# Altium PCB Wireless Temp PCB.PcbDoc
Units mm, origin at the board's own origin, x right, y up, seen from the top; angles counter-clockwise.
Board outline 166.37 x 113 mm, 2 copper layers (Top Layer, Bottom Layer); 74 components, 152 nets, 589 pads, 192 vias.
Unrouted connection lines stored in the file: 15.
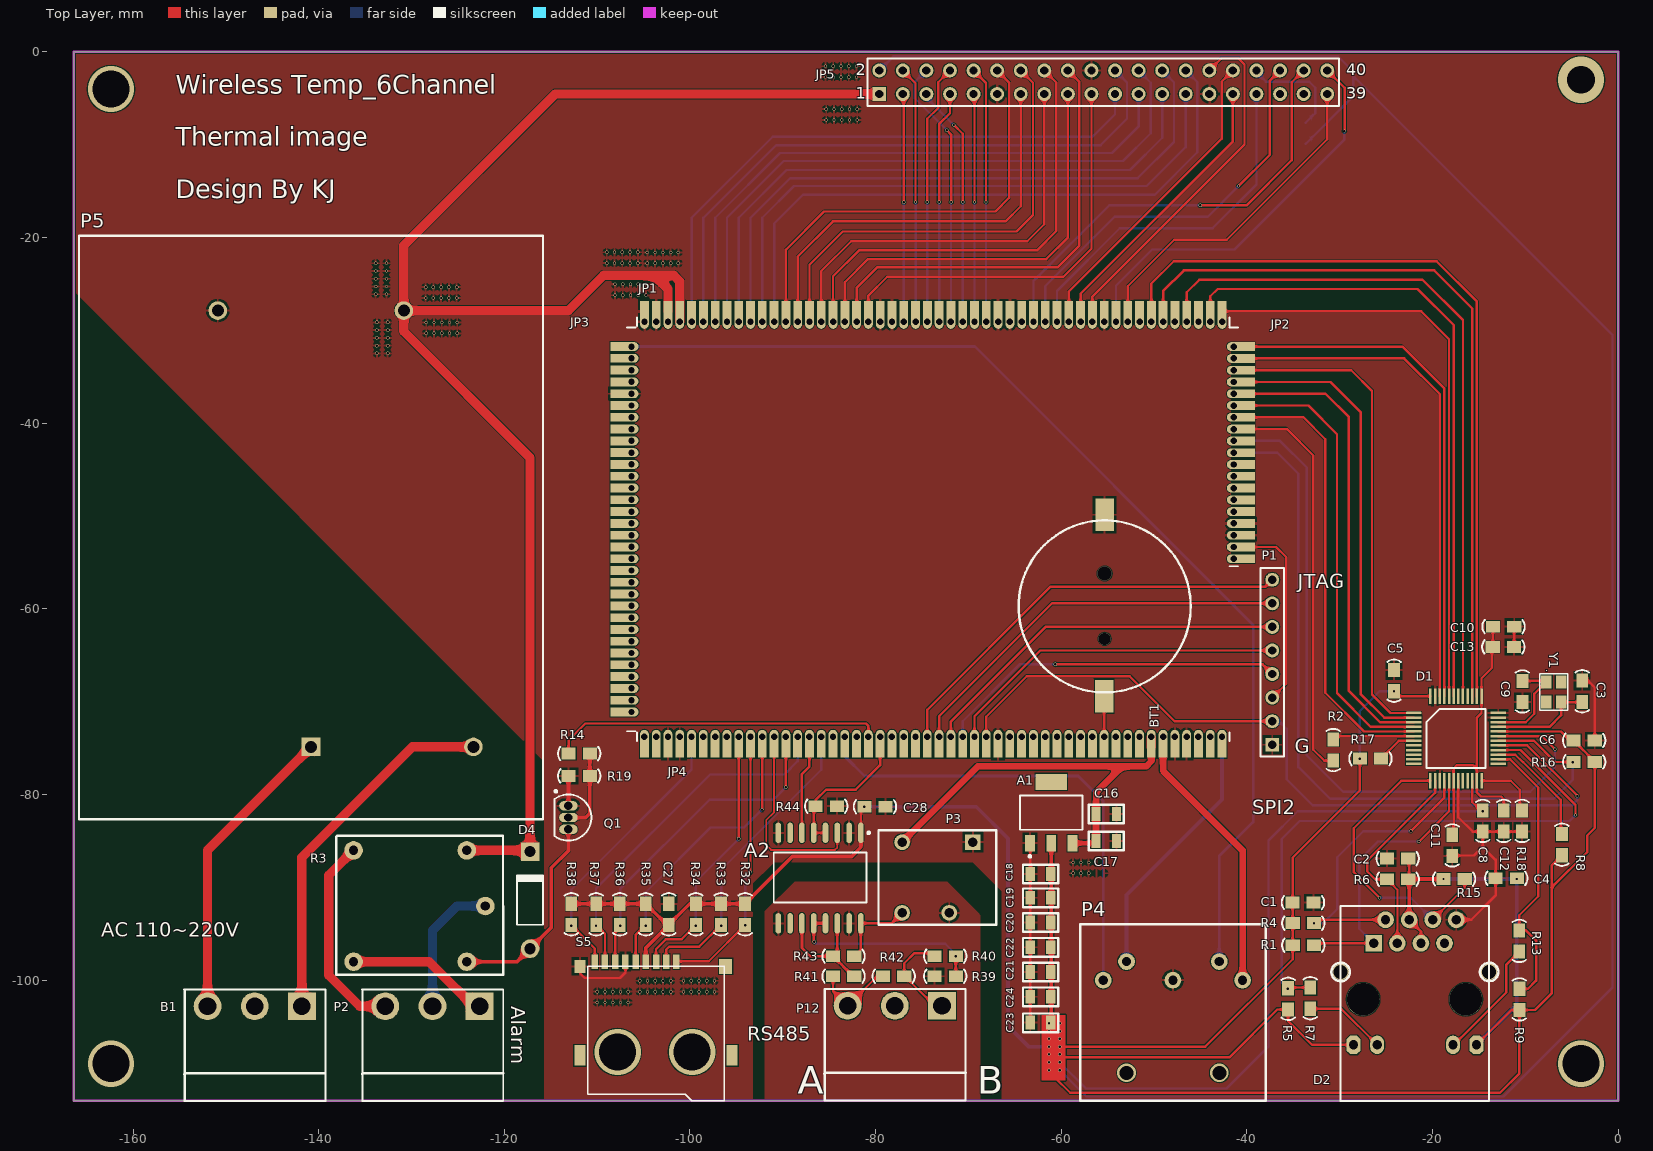
[diagram p0: Top Layer view]
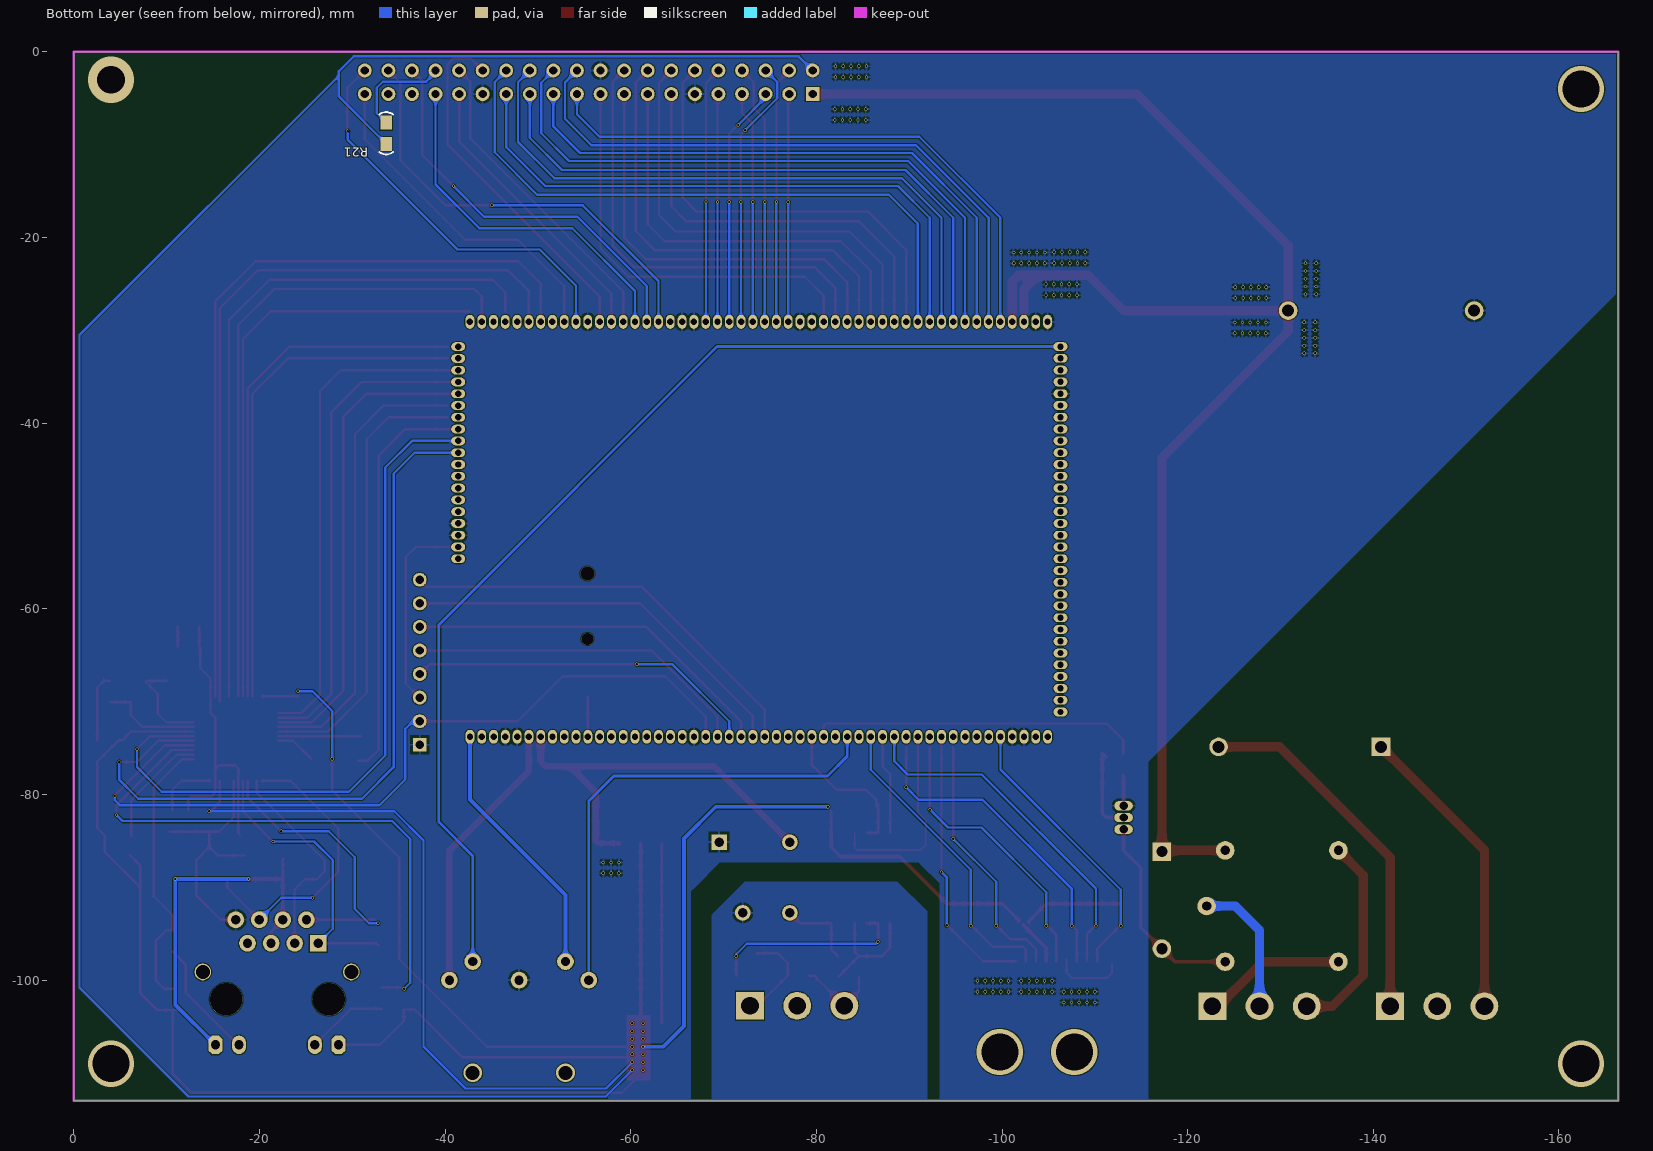
[diagram p1: Bottom Layer view, seen from below]

## Layer stack, top to bottom
Top Solder: solder mask 0.0102, Solder Resist, Dk 3.5
Top Layer: signal copper 0.0356
Dielectric 1: dielectric 0.32, FR-4, Dk 4.8
Bottom Layer: signal copper 0.0356
Bottom Solder: solder mask 0.0102, Solder Resist, Dk 3.5

## Board outline
-166.37,-113 -166.37,0 0,0 0,-113

## Design rules (kind name [scope] priority, off if disabled: settings)
Clearance [All] p1: gap=0.1
PolygonConnect [All] p1: connectstyle=Relief reliefconductorwidth=0.254 reliefentries=4 polygonreliefangle="90 Angle" airgapwidth=0.254
RoutingVias [All] p1: holewidth=0.711 width=1.27 viastyle="Through Hole" minholewidth=0.711 minwidth=1.27 maxholewidth=0.711 maxwidth=1.27
SolderMaskExpansion [All] p1: expansion=0.102
Width [All] p1: maxlimit=3 minlimit=0.1 preferedwidth=0.254 minimp=50.000000 maximp=50.000000 favimp=50.000000
30 further rules are at their usual default settings.

## Classes and differential pairs
component class RS232_485_SDcard: A2 C27 C28 P3 P4 P12 R32 R33 R34 R35 R36 R37 R38 R39 R40 R41 R42 R43 R44 S5
component class Power_USB: A1 B1 BT1 C16 C17 C18 C19 C20 C21 C22 C23 C24 P1 P5
component class main: JP1 JP2 JP3 JP4
component class LwIP: C1 C2 C3 C4 C5 C6 C8 C9 C10 C11 C12 C13 D1 D2 R1 R2 R4 R5 R6 R7 R8 R9 R13 R15 R16 R17 R18 Y1
component class LCD_Button_LED: D4 JP5 P2 Q1 R3 R14 R19 R21

## Components (designator, comment, footprint, x,y, rotation, side; value= is the part's Value field where it differs from the comment)
A1 "AMS1117-3.3V" AMS1117-3.3 -61.325,-81.823 r0 top
A2 "ADM2484E" RW-16 -81.585,-83.236 r270 top
B1 "Header 3" 歐式端子*3p -141.808,-102.819 r180 top
BT1 "Battery" "CR1220 battery holder" -55.321,-59.741 r90 top
C1 "Cap" 0805_C -35.09,-91.655 r0 top
C2 "Cap" 0805_C -22.612,-86.893 r180 top
C3 "Cap" 0805_C -3.878,-67.746 r270 top
C4 "Cap" 0805_C -10.912,-89.025 r180 top
C5 "Cap" 0805_C -24.13,-68.885 r90 top
C6 "Cap" 0805_C -4.797,-74.192 r0 top
C8 "Cap" 0805_C -14.597,-81.72 r270 top
C9 "Cap" 0805_C -10.305,-70.046 r90 top
C10 "Cap" 0805_C -13.48,-61.934 r0 top
C11 "Cap" 0805_C -17.882,-84.353 r270 top
C12 "Cap" 0805_C -12.337,-81.72 r270 top
C13 "Cap" 0805_C -13.505,-64.118 r0 top
C16 "Cap" 0805 -56.248,-82.11 r90 top
C17 "Cap" 0805 -56.248,-85.031 r90 top
C18 "Cap" 0805 -61.125,-88.554 r270 top
C19 "Cap" 0805 -61.125,-91.127 r270 top
C20 "Cap" 0805 -61.125,-93.794 r270 top
C21 "Cap" 0805 -61.125,-99.128 r270 top
C22 "Cap" 0805 -61.125,-96.461 r270 top
C23 "Cap" 0805 -61.125,-104.589 r270 top
C24 "Cap" 0805 -61.125,-101.795 r270 top
C27 "Cap" 0805_C -102.265,-94.057 r90 top
C28 "Cap" 0805_C -81.204,-81.331 r0 top
D1 "DP83848CVV" LQFP48 -17.467,-73.975 r0 top
D2 "HR911105A" RJ45-LED -26.314,-96.042 r180 top
D4 "Diode 1N4007" DO-41 -117.221,-91.389 r90 top
JP1 "HEADER 25X2" SIP-50-1.27-SMD -104.902,-29.083 r90 top
JP2 "HEADER 10X2" SIP-20-1.27-SMD -41.402,-30.48 r0 top
JP3 "HEADER 17X2" SIP-34-1.27-SMD -106.299,-72.39 r180 top
JP4 "HEADER 25X2" SIP-50-1.27-SMD -42.672,-73.787 r270 top
JP5 "HEADER 20X2    LCD 7 inch" HDR2X20 -79.602,-4.542 r0 top
P1 "JTAG轉版" HDR1X8 -37.262,-74.651 r90 top
P2 "Header 3" 歐式端子*3p -122.657,-102.819 r180 top
P3 "Header 4" B0505S-1W -69.52,-85.141 r180 top
P4 "Header 5" "DIN 固定座 方型 5P TO PCB 2003" -57.963,-113.005 r0 top
P5 "PM-05-5" "MW PM-05-5" -115.824,-82.677 r90 top
P12 "Header 3" 歐式端子*3p -72.847,-102.768 r180 top
Q1 "2N3904" TO-92A -113.093,-82.491 r180 top
R1 "Res1" 0805_C -35.057,-96.255 r0 top
R2 "Res1" 0805_C -30.683,-76.352 r90 top
R3 "LEG-SERIES 24V relay" "LEG-SERIES 5V" -122.037,-92.024 r180 top
R4 "Res1" 0805_C -35.057,-93.876 r0 top
R5 "Res1" 0805_C -35.563,-100.885 r270 top
R6 "Res1" 0805_C -22.612,-89.125 r180 top
R7 "Res1" 0805_C -33.163,-103.085 r90 top
R8 "Res1" 0805_C -6.071,-84.277 r270 top
R9 "Res1" 0805_C -10.647,-100.943 r270 top
R13 "Res1" 0805_C -10.636,-96.925 r90 top
R14 "Res1" 0805_C -113.064,-75.603 r0 top
R15 "Res1" 0805_C -18.812,-89.125 r0 top
R16 "Res1" 0805_C -4.797,-76.513 r0 top
R17 "Res1" 0805_C -25.545,-76.132 r180 top
R18 "Res1" 0805_C -10.355,-81.72 r270 top
R19 "Res1" 0805_C -113.064,-78.016 r0 top
R21 "Res1" 0805_C -33.655,-9.906 r90 bottom
R32 "Res1" 0805_C -94.065,-91.779 r270 top
R33 "Res1" 0805_C -96.665,-91.779 r270 top
R34 "Res1" 0805_C -99.365,-91.779 r270 top
R35 "Res1" 0805_C -104.771,-91.779 r270 top
R36 "Res1" 0805_C -107.565,-91.779 r270 top
R37 "Res1" 0805_C -110.114,-91.779 r270 top
R38 "Res1" 0805_C -112.785,-91.779 r270 top
R39 "Res1" 0805_C -73.635,-99.593 r0 top
R40 "Res1" 0805_C -73.635,-97.434 r0 top
R41 "Res1" 0805_C -84.582,-99.593 r0 top
R42 "Res1" 0805_C -76.911,-99.573 r180 top
R43 "Res1" 0805_C -84.582,-97.434 r0 top
R44 "Res1" 0805_C -84.176,-81.255 r180 top
S5 "TF_CARD" TF-CARD -103.644,-98.507 r0 top
Y1 "25MHz-SMD" XTAL-3225 -6.926,-68.979 r270 top

## Footprints (in the part's own frame and the unit in brackets; to place one, negate y for a bottom-side part, rotate by r counter-clockwise, add the part's x,y. Pads: shape width x height; smd on the part's side, far side on the other; paste and mask are expansions set on the pad)
0805 [mil] "SMD"
  rect 59x39 smd: 1(0,0) 2(0,-87)
  silkscreen extent -39,-118 40,31
0805_C [mil]
  rect 60x50 smd: 1(-0.16,0.4) 2(89.84,0.4)
  silkscreen extent -45,-28 135,29
AMS1117-3.3 [mm] "AMS1117-3.3V"
  rect 1.05x1.75 smd: 1(-2.046,-3.427) 2(0.254,-3.427) 3(2.554,-3.427)
  rect 3.4x1.75 smd: 4(0.254,3.173)
  silkscreen extent -3.1,-4.98 3.6,1.72
B0505S-1W [mm] "NCSHAK B0505S-1W DC-DC?源模? 5V?5V 隔离???源模? SIP"
  rect 1.7x1.7 hole 1: 1(0,0)
  round 1.7 hole 1: 2(7.62,0) 3(7.62,7.62) 4(2.54,7.62)
  silkscreen extent -2.54,-1.27 10.16,8.89
"CR1220 battery holder" [mm] "CR1220 電池角座"
  rect 3.5x2 smd: 1(-9.703,0.051) 2(9.881,0)
  silkscreen extent -9.27,-9.27 9.27,9.27
"DIN 固定座 方型 5P TO PCB 2003" [mm]
  round 1.8 hole 1: 1(17.5,13) 2(10,13) 3(2.5,13) 4(15,15) 5(5,15)
  silkscreen extent 0,0 20,19
DO-41 [mm] "Diode, Axial; Body 5.2 x 2.7 mm (LxDia. max), Lead Dia. 0.86 mm (max)"
  round 2 hole 1.2: 1(-5.23,0)
  rect 2x2 hole 1.2: 2(5.23,0)
  silkscreen extent -2.65,-1.4 2.75,1.4
HDR1X8 [mm] "Connector; Header; 8 Position"
  rect 1.5x1.5 hole 0.9: 1(0,0)
  round 1.5 hole 0.9: 2(2.54,0) 3(5.08,0) 4(7.62,0) 5(10.16,0) 6(12.7,0) 7(15.24,0) 8(17.78,0)
  silkscreen extent -1.27,-1.27 19.05,1.27
HDR2X20 [mm] "Connector; Header; 20x2 Position"
  rect 1.5x1.5 hole 0.9: 1(0,0)
  round 1.5 hole 0.9: 2(0,2.54) 3(2.54,0) 4(2.54,2.54) 5(5.08,0) 6(5.08,2.54) 7(7.62,0) 8(7.62,2.54) 9(10.16,0) 10(10.16,2.54) 11(12.7,0) 12(12.7,2.54) 13(15.24,0) 14(15.24,2.54) 15(17.78,0) 16(17.78,2.54) 17(20.32,0) 18(20.32,2.54) 19(22.86,0) 20(22.86,2.54) 21(25.4,0) 22(25.4,2.54) 23(27.94,0) 24(27.94,2.54) 25(30.48,0) 26(30.48,2.54) 27(33.02,0) 28(33.02,2.54) 29(35.56,0) 30(35.56,2.54) 31(38.1,0) 32(38.1,2.54) 33(40.64,0) 34(40.64,2.54) 35(43.18,0) 36(43.18,2.54) 37(45.72,0) 38(45.72,2.54) 39(48.26,0) 40(48.26,2.54)
  silkscreen extent -1.27,-1.27 49.53,3.81
"LEG-SERIES 5V" [mm] "Realy 5V"
  round 2 hole 1: 1(2,-6) 2(2,6) 3(14.2,6) 4(14.2,-6) 5(0,0)
  silkscreen extent -1.93,-7.58 16.08,7.42
LQFP48 [mm]
  oval 1.7x0.27 smd: 1(-4.551,2.756)
  rect 1.7x0.27 smd: 2(-4.551,2.256) 3(-4.551,1.756) 4(-4.551,1.256) 5(-4.551,0.756) 6(-4.551,0.256) 7(-4.551,-0.244) 8(-4.551,-0.744) 9(-4.551,-1.244) 10(-4.551,-1.744) 11(-4.551,-2.244) 12(-4.551,-2.744) 25(4.549,-2.744) 26(4.549,-2.244) 27(4.549,-1.744) 28(4.549,-1.244) 29(4.549,-0.744) 30(4.549,-0.244) 31(4.549,0.256) 32(4.549,0.756) 33(4.549,1.256) 34(4.549,1.756) 35(4.549,2.256) 36(4.549,2.756)
  rect 0.27x1.7 smd: 13(-2.751,-4.544) 14(-2.251,-4.544) 15(-1.751,-4.544) 16(-1.251,-4.544) 17(-0.751,-4.544) 18(-0.251,-4.544) 19(0.249,-4.544) 20(0.749,-4.544) 21(1.249,-4.544) 22(1.749,-4.544) 23(2.249,-4.544) 24(2.749,-4.544) 37(2.749,4.556) 38(2.249,4.556) 39(1.749,4.556) 40(1.249,4.556) 41(0.749,4.556) 42(0.249,4.556) 43(-0.251,4.556) 44(-0.751,4.556) 45(-1.251,4.556) 46(-1.751,4.556) 47(-2.251,4.556) 48(-2.751,4.556)
  silkscreen extent -3.17,-3.16 3.16,3.17
"MW PM-05-5" [mm] "MEAN WELL  Input 100-240VAC , Ootput 5V"
  rect 2x2 hole 1.3: 1(7.8,25)
  round 2 hole 1.3: 2(7.8,7.5) 3(54.8,15) 4(54.8,35.04)
  silkscreen extent 0,0 62.85,50
RJ45-LED [mm]
  round 3.5 hole 3.5 unplated: 0(-9.9,6.035) 0(1.16,6.035)
  rect 1.8x1.8 hole 1: 1(0.01,-0.005)
  round 1.8 hole 1: 2(-1.26,-2.545) 3(-2.53,-0.005) 4(-3.8,-2.545) 5(-5.07,-0.005) 6(-6.34,-2.545) 7(-7.61,-0.005) 8(-8.88,-2.545)
  oct 1.5x2 hole 0.991: 9(2.185,10.935) 12(-11.065,10.935)
  oval 1.5x2 hole 0.991: 10(-0.355,10.935) 11(-8.525,10.935)
  round 1.8 hole 1.5: S1(-12.42,3.085) S2(3.58,3.085)
  silkscreen extent -13.42,-4.02 4.58,16.98
RW-16 [mm]
  oval 2.2x0.6 smd: 1(0.9,0) 2(0.9,-1.27) 3(0.9,-2.54) 4(0.9,-3.81) 5(0.9,-5.08) 6(0.9,-6.35) 7(0.9,-7.62) 8(0.9,-8.89) 9(10.65,-8.89) 10(10.65,-7.62) 11(10.65,-6.35) 12(10.65,-5.08) 13(10.65,-3.81) 14(10.65,-2.54) 15(10.65,-1.27) 16(10.65,0)
  silkscreen extent 0.78,-9.39 8.42,0.98
SIP-20-1.27-SMD [mm]
  oval 1.5x0.95 hole 0.69: 2(0,-1.273) 3(0,-2.543) 4(0,-3.813) 5(0,-5.083) 6(0,-6.353) 7(0,-7.623) 8(0,-8.893) 9(0,-10.163) 10(0,-11.433) 11(0,-12.703) 12(0,-13.973) 13(0,-15.243) 14(0,-16.513) 15(0,-17.783) 16(0,-19.053) 17(0,-20.323) 18(0,-21.593) 19(0,-22.863) 20(0,-24.133)
  rect 2.25x0.95 smd: 2(1.13,-1.273) 3(1.13,-2.543) 4(1.13,-3.813) 5(1.13,-5.083) 6(1.13,-6.353) 7(1.13,-7.623) 8(1.13,-8.893) 9(1.13,-10.163) 10(1.13,-11.433) 11(1.13,-12.703) 12(1.13,-13.973) 13(1.13,-15.243) 14(1.13,-16.513) 15(1.13,-17.783) 16(1.13,-19.053) 17(1.13,-20.323) 18(1.13,-21.593) 19(1.13,-22.863) 20(1.13,-24.133)
  silkscreen extent -0.47,-24.93 0.47,0.8
SIP-34-1.27-SMD [mm]
  oval 1.5x0.95 hole 0.69: 2(0,-1.273) 3(0,-2.543) 4(0,-3.813) 5(0,-5.083) 6(0,-6.353) 7(0,-7.623) 8(0,-8.893) 9(0,-10.163) 10(0,-11.433) 11(0,-12.703) 12(0,-13.973) 13(0,-15.243) 14(0,-16.513) 15(0,-17.783) 16(0,-19.053) 17(0,-20.323) 18(0,-21.593) 19(0,-22.863) 20(0,-24.133) 21(0,-25.403) 22(0,-26.673) 23(0,-27.943) 24(0,-29.213) 25(0,-30.483) 26(0,-31.753) 27(0,-33.023) 28(0,-34.293) 29(0,-35.563) 30(0,-36.833) 31(0,-38.103) 32(0,-39.373) 33(0,-40.643)
  rect 2.25x0.95 smd: 2(1.13,-1.273) 3(1.13,-2.543) 4(1.13,-3.813) 5(1.13,-5.083) 6(1.13,-6.353) 7(1.13,-7.623) 8(1.13,-8.893) 9(1.13,-10.163) 10(1.13,-11.433) 11(1.13,-12.703) 12(1.13,-13.973) 13(1.13,-15.243) 14(1.13,-16.513) 15(1.13,-17.783) 16(1.13,-19.053) 17(1.13,-20.323) 18(1.13,-21.593) 19(1.13,-22.863) 20(1.13,-24.133) 21(1.13,-25.403) 22(1.13,-26.673) 23(1.13,-27.943) 24(1.13,-29.213) 25(1.13,-30.483) 26(1.13,-31.753) 27(1.13,-33.023) 28(1.13,-34.293) 29(1.13,-35.563) 30(1.13,-36.833) 31(1.13,-38.103) 32(1.13,-39.373) 33(1.13,-40.643)
  silkscreen extent -0.47,-42.71 0.47,0.8
SIP-50-1.27-SMD [mm]
  oval 1.5x0.95 hole 0.69: 1(0,-0.003) 2(0,-1.273) 3(0,-2.543) 4(0,-3.813) 5(0,-5.083) 6(0,-6.353) 7(0,-7.623) 8(0,-8.893) 9(0,-10.163) 10(0,-11.433) 11(0,-12.703) 12(0,-13.973) 13(0,-15.243) 14(0,-16.513) 15(0,-17.783) 16(0,-19.053) 17(0,-20.323) 18(0,-21.593) 19(0,-22.863) 20(0,-24.133) 21(0,-25.403) 22(0,-26.673) 23(0,-27.943) 24(0,-29.213) 25(0,-30.483) 26(0,-31.753) 27(0,-33.023) 28(0,-34.293) 29(0,-35.563) 30(0,-36.833) 31(0,-38.103) 32(0,-39.373) 33(0,-40.643) 34(0,-41.913) 35(0,-43.183) 36(0,-44.453) 37(0,-45.723) 38(0,-46.993) 39(0,-48.263) 40(0,-49.533) 41(0,-50.803) 42(0,-52.073) 43(0,-53.343) 44(0,-54.613) 45(0,-55.883) 46(0,-57.153) 47(0,-58.423) 48(0,-59.693) 49(0,-60.963) 50(0,-62.233)
  rect 2.25x0.95 smd: 1(1.13,-0.003) 2(1.13,-1.273) 3(1.13,-2.543) 4(1.13,-3.813) 5(1.13,-5.083) 6(1.13,-6.353) 7(1.13,-7.623) 8(1.13,-8.893) 9(1.13,-10.163) 10(1.13,-11.433) 11(1.13,-12.703) 12(1.13,-13.973) 13(1.13,-15.243) 14(1.13,-16.513) 15(1.13,-17.783) 16(1.13,-19.053) 17(1.13,-20.323) 18(1.13,-21.593) 19(1.13,-22.863) 20(1.13,-24.133) 21(1.13,-25.403) 22(1.13,-26.673) 23(1.13,-27.943) 24(1.13,-29.213) 25(1.13,-30.483) 26(1.13,-31.753) 27(1.13,-33.023) 28(1.13,-34.293) 29(1.13,-35.563) 30(1.13,-36.833) 31(1.13,-38.103) 32(1.13,-39.373) 33(1.13,-40.643) 34(1.13,-41.913) 35(1.13,-43.183) 36(1.13,-44.453) 37(1.13,-45.723) 38(1.13,-46.993) 39(1.13,-48.263) 40(1.13,-49.533) 41(1.13,-50.803) 42(1.13,-52.073) 43(1.13,-53.343) 44(1.13,-54.613) 45(1.13,-55.883) 46(1.13,-57.153) 47(1.13,-58.423) 48(1.13,-59.693) 49(1.13,-60.963) 50(1.13,-62.233)
  silkscreen extent -0.47,-63.03 0.47,0.8
TF-CARD [mm]
  rect 0.7x1.6 smd: 1(2.19,0.488) 2(1.09,0.488) 3(-0.01,0.488) 4(-1.11,0.488) 5(-2.21,0.488) 6(-3.31,0.488) 7(-4.41,0.488) 8(-5.51,0.488) 9(-6.61,0.488)
  rect 1.2x1.4 smd: 10(-8.21,-0.012)
  rect 1.2x2.2 smd: 11(-8.21,-9.612) 13(8.19,-9.612)
  rect 1.4x1.6 smd: 12(7.49,-0.012)
  silkscreen extent -7.36,-14.51 7.34,-0.01
TO-92A [mm] "TO, Flat Index; 3 In-Line, Axial Leads; Body Dia. 4.5mm; Leads 0.51 x 0.48 mm (max)"
  oval 2x1 hole 0.9: 1(0,-1.27) 2(0,0) 3(0,1.27)
  silkscreen extent -2.48,-2.95 1.5,2.48, body extent -2.5,-2.5 1.5,2.5, height 6.86
XTAL-3225 [mm]
  rect 1.4x1.15 smd: 1(-1.113,-0.812) 2(1.087,-0.812) 3(1.087,0.788) 4(-1.113,0.788)
  silkscreen extent -1.96,-1.51 1.94,1.49
歐式端子*3p [mm]
  rect 3x3 hole 1.9: 1(0,0)
  round 3 hole 1.9: 2(5.08,0) 3(10.16,0)
  silkscreen extent -2.55,-1.8 12.68,10.2

## Part data
B1 P2 P12: "Header, 3-Pin"
BT1: "Multicell Battery"
C1 C2 C3 C4 C5 C6 C8 C9 C10 C11 C12 C13 C16 C17 C18 C19 C20 C21 C22 C23 C24 C27 C28: "Capacitor"
D4: library part "Diode 1N914", "High Conductance Fast Diode"
JP5: library part "HEADER 20X2"
P1: library part "Header 8", "Header, 8-Pin"
P3: "Header, 4-Pin"
P4: "Header, 5-Pin"
P5: library part "Header 4", "Header, 4-Pin"
Q1: "NPN General Purpose Amplifier"
R1 R2 R4 R5 R6 R7 R8 R9 R13 R14 R15 R16 R17 R18 R19 R21 R32 R33 R34 R35 R36 R37 R38 R39 R40 R41 R42 R43 R44: "Resistor"
R3: library part "LEG-SERIES 5V relay"
Y1: library part CRYSTAL-SMD, "Crystal"

## Via types
v1: diameter 0.356, hole 0.254, Top Layer to Bottom Layer, tented both sides, 182 vias
v2: diameter 5, hole 4, Top Layer to Bottom Layer, 5 vias
v3: diameter 2, hole 1.5, Top Layer to Bottom Layer, 2 vias
v4: diameter 1.5, hole 1.5, Top Layer to Bottom Layer, 1 vias
v5: diameter 1.3, hole 1.3, Top Layer to Bottom Layer, 1 vias
v6: diameter 5, hole 3, Top Layer to Bottom Layer, 1 vias

## Nets (pads, with @x,y where several pads share a name; then routed paths per layer and width w, separated by ;. In a path a pad name is that pad's centre, name@x,y a point inside that pad or via, vN(x,y) a via of type N, cw(c..) or ccw(c..) an arc to the next point about the centre after c; other vN are vias at no path point)
+3.3V: JP2.19 JP2.20 JP3.2 JP3.3 P1.3 | length 21.8
  Top Layer w0.254: JP2.19@-41.402,-53.343 -40.272,-53.343 -36.852,-53.343 -35.763,-54.432 -35.763,-68.072 P1.3
+3.3V_1: A1.2 A2.1 C1.1 C2.1 C4.1 C5.1 C6.1 C8.1 C18.1 C19.1 C20.1 C21.1 C22.1 C23.1 C24.1 C27.1 C28.1 D1.22 D1.32 D1.48 D2.4 D2.5 D2.9 D2.12 JP5.2 R1.1 R4.1 R5.2 R6.1 R8.2 R9.2 R15.1 R16.2 R17.2 R21.1 R32.1 R33.1 R34.1 R35.1 R36.1 R37.1 R38.1 S5.4 | length 673.4
  Top Layer w0.254: A2.1 C28.1@-81.585,-81.788 ; C28.1 v1(-81.205,-81.324) ; -60.655,-110.515 -59.03,-112.141 -12.725,-112.141 -10.636,-110.052 R9.2 ; v1(-60.147,-107.169) -44.481,-107.169 -35.061,-97.748 R1.1 R4.1 -35.061,-86.801 -27.827,-79.566 v1(-27.827,-76.142) ; -59.715,-108.331 -41.885,-108.331 -36.721,-103.167 R5.2 -35.553,-104.401 -32.982,-106.972 D2.9@-28.5,-106.972 ; C5.1@-24.167,-69.419 D1.48 ; C2.1 -22.515,-86.997 R6.1@-22.515,-89.115 ; D2.4@-22.515,-93.492 -21.245,-94.762 D2.5@-21.245,-96.032 ; D1.22 -15.718,-80.839 C8.1@-14.841,-81.716 ; D2.12@-15.25,-106.972 -11.503,-103.225 R9.2 ; D1.32 -6.162,-73.219 -5.199,-74.181 C6.1 R16.2@-2.515,-76.467 ; R8.2 -7.163,-87.662 -7.163,-90.043 ; R16.2 -2.515,-83.603 -3.331,-84.419 -3.331,-86.212 -7.163,-90.043 ; R9.2 -8.941,-103.225 -7.163,-101.448 -7.163,-90.043
  Top Layer w0.4: R38.1 R37.1 R36.1 R35.1 C27.1@-102.832,-93.704 ; S5.4@-104.754,-97.979 -104.754,-96.54 C27.1 ; C27.1@-101.85,-93.606 -100.019,-91.775 R34.1 R33.1 R32.1 -88.97,-86.69 -82.575,-86.69 -81.585,-85.7 A2.1 ; C23.1@-61.071,-104.535 A1.2 ; D2.4@-22.515,-93.492 -22.515,-89.115 v1(-18.816,-89.115)
  Bottom Layer w0.254: JP5.2 -78.083,-0.483 -30.15,-0.483 -28.55,-2.083 -28.55,-2.565 ; v1(-60.147,-109.7) -57.3,-112.547 -12.344,-112.547 -0.61,-100.813 -0.61,-30.505 -28.55,-2.565 ; v1(-60.147,-108.864) -57.328,-111.684 -42.189,-111.684 -37.668,-107.163 -37.668,-84.963 -34.519,-81.813 v1(-14.58,-81.813) ; R21.1 -28.55,-4.815 -28.55,-2.565 ; v1(-27.827,-76.142) -27.827,-71.007 -25.709,-68.889 v1(-24.14,-68.889)
  Bottom Layer w0.4: v1(-81.205,-81.324) -69.146,-81.324 -65.735,-84.734 -65.735,-104.953 -63.519,-107.169 v1(-61.316,-107.169) ; v1(-18.816,-89.115) v1(-10.908,-89.115) -10.908,-102.631 D2.12@-15.25,-106.972
  other v1: -61.316,-109.7 -61.316,-108.864 -61.316,-108.004 -60.147,-108.004 -61.316,-106.333 -60.147,-106.333 -61.316,-105.498 -60.147,-105.498 -61.316,-104.663 -60.147,-104.663
+5V_2: A2.16 P3.3 R43.2 | length 8.7
  Top Layer w0.3: R43.2 -81.585,-96.709 A2.16 -78.265,-93.886 P3.3
"AC L": B1.1 P5.2 | length 39.4
  Top Layer w1: B1.1 -141.808,-86.792 -129.893,-74.877 P5.2
"AC N": B1.3 P5.1 | length 32.6
  Top Layer w1: B1.3 -151.968,-86.021 P5.1
D1+: JP4.2
D1-: JP4.3
GND: A1.1 A2.2 A2.8 BT1.2 C1.2 C2.2 C3.1 C4.2 C5.2 C6.2 C8.2 C9.1 C10.2 C11.2 C12.2 C13.2 C16.2 C17.2 C18.2 C19.2 C20.2 C21.2 C22.2 C23.2 C24.2 C27.2 C28.2 D1.15 D1.19 D1.35 D1.36 D1.47 D2.8 JP1.1 JP1.2 JP1.21 JP1.22 JP1.31 JP1.32 JP1.40 JP2.17 JP2.18 JP3.29 JP4.4 JP4.5 JP4.20 JP4.47 JP4.48 JP5.11 JP5.20 JP5.29 P1.1 P3.1 P4.2 P5.4 Q1.1 R18.2 R19.1 R44.1 S5.6 S5.10 | length 68.3
  Top Layer w0.254: S5.10@-111.845,-98.276 -111.845,-99.269 -111.335,-99.779 -107.535,-99.779 -106.945,-99.189 S5.6@-106.945,-97.776 ; A1.1 -63.334,-85.286 C18.2 C19.2 C20.2 C22.2 C21.2 C24.2 C23.2@-63.334,-104.335 ; C11.2@-18.405,-86.585 -15.515,-86.585 -14.587,-85.656 ; D2.8@-17.435,-93.492 -15.815,-93.492 -13.194,-90.872 C4.2 -13.194,-87.049 -14.587,-85.656 ; D1.19 -17.218,-82.451 -15.667,-84.002 C8.2 ; C13.2 -11.198,-64.082 C10.2 ; R18.2 C12.2 C8.2 ; C3.1 -3.251,-67.742 -2.515,-68.478 C6.2 ; -14.587,-85.656 C8.2
  Top Layer w0.4: Q1.1 -113.093,-78.03 R19.1 ; C23.2 C23.2@-63.334,-104.335
  other v1: -109.982,-102.413 -109.147,-102.413 -108.311,-102.413 -107.476,-102.413 -106.64,-102.413 -109.982,-101.244 -109.147,-101.244 -108.311,-101.244 -107.476,-101.244 -106.64,-101.244 -105.399,-101.244 -104.563,-101.244 -103.728,-101.244 -102.893,-101.244 -102.057,-101.244 -100.7,-101.244 -99.864,-101.244 -99.029,-101.244 -98.194,-101.244 -97.358,-101.244 -105.399,-100.076 -104.563,-100.076 -103.728,-100.076 -102.893,-100.076 -102.057,-100.076 -100.7,-100.076 -99.864,-100.076 -99.029,-100.076 -98.194,-100.076 -97.358,-100.076 -58.714,-88.494 -57.878,-88.494 -57.043,-88.494 -58.714,-87.325 -57.878,-87.325 -57.043,-87.325 -133.731,-32.484 -132.563,-32.484 -133.731,-31.648 -132.563,-31.648 -133.731,-30.813 -132.563,-30.813 -128.411,-30.328 -127.576,-30.328 -126.74,-30.328 -125.905,-30.328 -125.07,-30.328 -133.731,-29.978 -132.563,-29.978 -128.411,-29.159 -127.576,-29.159 -126.74,-29.159 -125.905,-29.159 -125.07,-29.159 -133.731,-29.142 -132.563,-29.142 -128.473,-26.518 -127.638,-26.518 -126.802,-26.518 -125.967,-26.518 -125.132,-26.518 -108.066,-26.213 -107.23,-26.213 -106.395,-26.213 -105.56,-26.213 -104.724,-26.213 -133.858,-26.108 -132.69,-26.108 -128.473,-25.349 -127.638,-25.349 -126.802,-25.349 -125.967,-25.349 -125.132,-25.349 -133.858,-25.273 -132.69,-25.273 -108.066,-25.044 -107.23,-25.044 -106.395,-25.044 -105.56,-25.044 -104.724,-25.044 -133.858,-24.438 -132.69,-24.438 -133.858,-23.602 -132.69,-23.602 -104.586,-22.784 -103.751,-22.784 -102.915,-22.784 -102.08,-22.784 -101.244,-22.784 -133.858,-22.767 -132.69,-22.767 -108.955,-22.758 -108.119,-22.758 -107.284,-22.758 -106.449,-22.758 -105.613,-22.758 -104.586,-21.615 -103.751,-21.615 -102.915,-21.615 -102.08,-21.615 -101.244,-21.615 -108.955,-21.59 -108.119,-21.59 -107.284,-21.59 -106.449,-21.59 -105.613,-21.59 -85.319,-7.341 -84.483,-7.341 -83.648,-7.341 -82.812,-7.341 -81.977,-7.341 -85.319,-6.172 -84.483,-6.172 -83.648,-6.172 -82.812,-6.172 -81.977,-6.172 -85.395,-2.718 -84.559,-2.718 -83.724,-2.718 -82.889,-2.718 -82.053,-2.718 -85.395,-1.549 -84.559,-1.549 -83.724,-1.549 -82.889,-1.549 -82.053,-1.549
GND2: A2.9 A2.15 P3.4 R39.1
LCD_BL: JP5.34 R21.2 | length 11.4
  Bottom Layer w0.254: JP5.34 -38.962,-2.207 -37.948,-3.221 -33.279,-3.221 -32.639,-3.861 -32.639,-6.618 R21.2
LED_ACT: D1.26 R9.1 R13.2 | length 30.6
  Top Layer w0.254: D1.26 -11.64,-76.219 -8.603,-79.256 -8.603,-90.975 -10.647,-93.019 R13.2 -9.918,-94.643 -8.836,-95.725 -8.836,-100.055 -9.72,-100.939 R9.1
LED_LINK: D1.28 R5.1 R7.2 | length 63.3
  Top Layer w0.254: R5.1@-35.475,-100.803 R7.2 ; D1.28 -10.507,-75.219 -4.597,-81.128 v1(-4.597,-82.22)
  Bottom Layer w0.254: v1(-35.585,-100.94) -36.246,-100.279 -36.246,-84.811 -34.29,-82.855 -5.232,-82.855 v1(-4.597,-82.22)
NetA2_11: A2.11 A2.14 R41.2 R43.1 | length 13.2
  Top Layer w0.3: A2.11 -87.935,-96.545 -87.056,-97.424 R43.1 ; A2.14 -84.125,-96.963 R43.1 ; R41.2@-82.427,-99.583 R43.1
NetA2_12: A2.12 A2.13 R39.2 R40.2 | length 21.9
  Top Layer w0.3: v1(-86.614,-95.885) -86.665,-95.834 A2.12 A2.13 ; R39.2@-71.353,-99.507 v1(-71.353,-97.424) R40.2@-71.353,-97.094
  Bottom Layer w0.254: v1@-86.639,-95.936 v1@-86.639,-95.91 ; v1@-86.639,-95.86 v1@-86.639,-95.91 ; v1@-86.614,-95.936 v1@-86.639,-95.91 ; v1(-86.614,-95.885) -86.411,-96.088 -72.492,-96.088 -71.353,-97.227 v1(-71.353,-97.424) ; v1@-71.378,-97.475 v1@-71.378,-97.45 ; v1@-71.378,-97.399 v1@-71.378,-97.45 ; v1@-71.353,-97.475 v1@-71.378,-97.45
NetC3_2: C3.2 D1.33 Y1.3 | length 11
  Top Layer w0.254: D1.33 -7.381,-72.719 -6.138,-71.476 Y1.3 -3.906,-70.066 C3.2
NetC9_2: C9.2 D1.34 Y1.1 | length 10.6
  Top Layer w0.254: D1.34 -9.947,-72.219 -9.035,-71.306 -9.035,-69.163 Y1.1 -7.84,-67.765 C9.2@-10.035,-67.765
NetC10_1: C10.1 C11.1 C12.1 C13.1 D1.18 D1.23 D1.37 | length 33
  Top Layer w0.254: C11.1 -17.718,-84.196 D1.18 -17.718,-77.17 -17.391,-76.843 -15.664,-76.843 -15.218,-77.289 ; C10.1 -13.509,-61.949 C13.1 -13.607,-64.205 -13.607,-66.379 -14.718,-67.49 D1.37 -14.718,-71.224 -15.218,-71.724 -15.218,-77.289 ; C12.1 -12.326,-80.511 -12.616,-80.222 -14.775,-80.222 -15.218,-79.778 D1.23 -15.218,-77.289
NetD1_6: D1.6 R2.2 | length 8.9
  Top Layer w0.254: R2.2@-30.937,-73.719 D1.6
NetD1_7: D1.7 R17.1 | length 4.3
  Top Layer w0.254: R17.1 -23.617,-74.219 D1.7
NetD1_24: D1.24 R18.1 | length 6.7
  Top Layer w0.254: D1.24 -11.575,-78.519 -10.599,-79.495 R18.1@-10.599,-81.716
NetD1_27: D1.27 R8.1 | length 12.7
  Top Layer w0.254: D1.27 -11.073,-75.719 -10.254,-76.539 -10.228,-76.539 -6.177,-80.59 R8.1@-6.177,-84.52
NetD2_10: D2.10 R7.1 | length 8.8
  Top Layer w0.254: R7.1 -29.843,-103.089 D2.10@-25.96,-106.972
NetD2_11: D2.11 R13.1 | length 13
  Top Layer w0.254: D2.11@-17.712,-106.99 -12.036,-101.315 -12.036,-98.319 R13.1
NetQ1_2: Q1.2 R14.2 R19.2 | length 9.5
  Top Layer w0.4: Q1.2 -111.218,-82.491 -110.782,-82.055 R19.2 R14.2 R14.2@-111.159,-75.969
PA0_MII_CRS_WAKEUP: JP1.46
PA1_MII_RX_CLK: D1.38 JP1.44 | length 84.5
  Top Layer w0.254: JP1.44@-50.289,-29.083 -50.289,-27.953 -50.289,-24.965 -47.879,-22.555 -19.558,-22.555 -15.218,-26.895 D1.38 D1.38@-15.218,-69.458
PA2_MII_MDIO: D1.30 JP2.11 R16.1 | length 82.3
  Top Layer w0.254: D1.30 -9.068,-74.219 -6.784,-76.503 R16.1
  Bottom Layer w0.254: JP2.11@-41.402,-43.183 -36.7,-43.183 -34.442,-45.441 -34.442,-77.055 -31.03,-80.467 -6.929,-80.467 -4.869,-78.407 v1(-4.869,-76.513)
PA3_MII_COL: JP1.48
PA4_DCMI_HSYNC: A2.4 A2.5 JP4.30 R44.2 | length 16.6
  Top Layer w0.254: R44.2@-86.655,-81.073 -86.655,-84.126 A2.5 A2.4 ; R44.2 -86.458,-80.616 -85.319,-79.477 -82.144,-79.477 -79.505,-76.838 -79.505,-74.917 JP4.30@-79.505,-73.787
PA5_ADC_DAC: JP4.13
PA6_DCMI_PCLK: JP4.34
PA7_MII_RX_DV: D1.39 JP1.45 | length 81.6
  Top Layer w0.254: JP1.45@-49.019,-29.083 -49.019,-27.953 -49.019,-25.778 -46.782,-23.541 -19.816,-23.541 -15.718,-27.64 D1.39 D1.39@-15.718,-69.96
PA8_MCO1: JP1.43 JP3.8
PA9_FS_VBUS1_UART1_TX: JP4.8
PA10_USB1_FS_ID_UART1_RX: JP4.1 P4.5 | length 28.5
  Bottom Layer w0.4: P4.5 -52.963,-90.834 -42.675,-80.547 JP4.1@-42.675,-73.787
PA13_TMS: JP4.26 P1.8 | length 45.9
  Top Layer w0.254: JP4.26@-74.425,-73.787 -74.425,-70.895 -61.138,-57.607 -37.998,-57.607 P1.8
PA14_TCK: JP4.25 P1.7 | length 43.1
  Top Layer w0.254: JP4.25@-73.155,-73.787 -73.155,-71.58 -60.985,-59.411 P1.7
PA15_TDI: JP4.24 P1.6 | length 40.5
  Top Layer w0.254: JP4.24@-71.885,-73.787 -71.885,-72.139 -61.697,-61.951 P1.6
PB0_EXP1_KEY_LEFT: JP4.45
PB1_EXP2_KEY_RIGHT: JP4.44
PB3_TDO_I2S3_CK: JP4.22 P1.5 | length 37.2
  Top Layer w0.254: JP4.22@-69.345,-73.787 -69.345,-71.58 -62.255,-64.491 P1.5
PB4_TRST: JP4.23 P1.4 | length 38.1
  Top Layer w0.254: v1(-60.655,-65.989) -38.303,-65.989 P1.4
  Bottom Layer w0.254: JP4.23@-70.615,-73.787 -70.615,-72.114 -64.491,-65.989 v1(-60.655,-65.989) ; P1.4@-37.262,-66.929 P1.4@-37.109,-66.929
PB7_KEY_LEFT: JP4.29
PB8_MII_TXD3_DCMI_D6: JP2.9 JP4.32 R2.1 | length 44.1
  Top Layer w0.254: JP2.9@-41.402,-40.643 -40.272,-40.643 -35.684,-40.643 -32.842,-43.485 -32.842,-75.184 -31.67,-76.356 R2.1
PB9_DCMI_D7: JP4.31 R14.1 | length 35.7
  Top Layer w0.254: R14.1 -113.068,-74.155 -111.277,-72.365 -81.026,-72.365 -80.775,-72.615 JP4.31@-80.775,-73.787
PB10_MII_RX_ER: D1.41 JP1.47 | length 74.7
  Top Layer w0.254: JP1.47@-46.479,-27.953 -46.479,-25.905 -45.115,-24.541 -21.077,-24.541 -16.718,-28.9 D1.41
PB11_MII_TX_EN: D1.2 JP2.5 | length 52.1
  Top Layer w0.254: JP2.5@-41.402,-35.563 -40.272,-35.563 -30.985,-35.563 -27.74,-38.808 -27.74,-69.176 -25.197,-71.719 D1.2
PB12_USB2_FS_ID_CAN2_RX: JP3.31
PB13_FS_VBUS2_CAN2_TX: JP3.30
PB14_USB2_FS_DM: JP3.33 P4.4 | length 117.2
  Bottom Layer w0.3: JP3.33@-106.299,-31.747 -69.294,-31.747 -39.319,-61.722 -39.319,-82.956 -42.963,-86.6 P4.4
PB15_USB2_FS_DP: JP3.32
PC0_FMC_SDNWE: JP2.13
PC1_MII_MDC: D1.31 JP2.10 | length 78.1
  Top Layer w0.254: D1.31 -8.222,-73.719 v1(-6.799,-75.142)
  Bottom Layer w0.254: JP2.10@-41.402,-41.913 -36.42,-41.913 -33.553,-44.78 -33.553,-75.794 -29.636,-79.711 -9.473,-79.711 -6.799,-77.037 v1(-6.799,-75.142)
PC2_MII_TXD2: D1.5 JP2.8 | length 48.3
  Top Layer w0.254: JP2.8@-40.272,-39.373 -33.906,-39.373 -31.55,-41.729 -31.55,-69.05 -27.381,-73.219 D1.5
PC3_MII_TX_CLK: D1.1 JP2.4 | length 53.8
  Top Layer w0.254: JP2.4@-41.402,-34.293 -40.272,-34.293 -28.746,-34.293 -26.514,-36.525 -26.514,-69.218 -24.514,-71.219 D1.1
PC4_MII_RXD0: D1.43 JP1.49 | length 70.9
  Top Layer w0.254: JP1.49@-43.939,-29.083 -43.939,-27.953 -43.939,-26.337 -43.144,-25.541 -21.601,-25.541 -17.718,-29.424 D1.43
PC5_MII_RXD1: D1.44 JP1.50 | length 64.2
  Top Layer w0.254: JP1.50@-42.669,-27.953 -21.221,-27.953 -18.218,-30.956 D1.44
PC6_DCMI_D0_LCD_DISP_UART6_TX: A2.6 JP4.36 JP5.35 | length 10.7
  Top Layer w0.254: A2.6 -87.935,-77.8 -87.125,-76.991 -87.125,-74.917 JP4.36@-87.125,-73.787
PC7_DCMI_D1_UART6_RX: A2.3 JP4.39 | length 21.6
  Top Layer w0.2: JP4.39@-90.935,-73.787 -90.935,-74.917 -90.935,-81.918 -91.77,-82.753 -91.77,-85.471 -91.262,-85.979 -84.379,-85.979 -84.125,-85.725 A2.3
PC8_DCMI_D2_SDIO_D0: JP4.38 R36.2 S5.7 | length 34.7
  Top Layer w0.254: S5.7@-108.054,-97.979 -108.054,-94.597 R36.2@-107.518,-94.061 ; v1@-89.665,-79.219 JP4.38@-89.665,-74.917
  Bottom Layer w0.254: v1(-107.518,-94.132) -107.518,-90.195 -97.892,-80.569 -91.008,-80.569 v1@-89.687,-79.248
  other v1: -89.662,-79.223
PC9_DCMI_D3_SDIO_D1: JP4.37 R37.2 S5.8 | length 38.3
  Top Layer w0.254: R37.2@-110.114,-94.061 -109.154,-95.021 S5.8@-109.154,-97.979
  Bottom Layer w0.254: v1(-110.114,-94.132) -110.114,-90.149 -97.815,-77.851 -89.818,-77.851 -88.395,-76.429 JP4.37@-88.395,-73.787
PC10_DCMI_D8_SDIO_D2: JP4.41 R32.2 S5.1 | length 29.6
  Top Layer w0.254: S5.1@-101.454,-97.979 -97.973,-97.979 R32.2 ; v1@-93.475,-88.363 -93.475,-74.917 JP4.41@-93.475,-73.787
  Bottom Layer w0.254: v1(-94.056,-94.107) -94.056,-88.951 v1(-93.472,-88.367)
PC11_DCMI_D4_SDIO_D3: JP4.35 R33.2 S5.2 | length 33.1
  Top Layer w0.254: S5.2@-102.554,-97.979 -102.554,-96.712 -102.235,-96.393 -98.987,-96.393 R33.2
  Bottom Layer w0.254: v1(-96.622,-94.132) -96.622,-88.113 -85.855,-77.346 JP4.35@-85.855,-73.787
PC12_DCMI_D9_SDIO_CK: JP4.40 R35.2 S5.5 | length 30.9
  Top Layer w0.254: S5.5@-105.854,-97.979 -105.854,-95.145 R35.2@-104.771,-94.061 ; v1@-92.205,-81.607 JP4.40@-92.205,-74.917
  Bottom Layer w0.254: v1@-104.761,-94.132 -104.761,-90.537 -97.79,-83.566 -94.164,-83.566 v1(-92.231,-81.632)
  other v1: -104.75,-94.158
PC13_TAMPER: JP2.16
PD0_FMC_D2: JP3.18
PD1_FMC_D3: JP3.17
PD2_DCMI_D11_SDIO_CMD: JP4.42 R34.2 S5.3 | length 27.8
  Top Layer w0.254: S5.3@-103.654,-97.979 -103.654,-96.669 -102.591,-95.606 -100.899,-95.606 R34.2 ; v1@-94.745,-84.731 JP4.42@-94.745,-74.917
  Bottom Layer w0.254: v1(-99.365,-94.132) -99.365,-89.408 v1(-94.742,-84.785)
PD3_DCMI_D5: JP4.33 P4.3 | length 51.2
  Bottom Layer w0.3: JP4.33@-83.315,-73.787 -83.315,-75.892 -81.178,-78.029 -58.166,-78.029 -55.463,-80.732 P4.3
PD4_FSMC_NOE: JP3.6
PD5_FSMC_NWE: JP3.7
PD6_FMC_NWAIT_DCMI_D10_I2S3_SD: JP4.43
PD7_NE1_REDE: JP3.4
PD8_FMC_D13: JP3.26
PD9_FMC_D14: JP3.27
PD10_FMC_D15: JP3.28
PD13_LED: JP4.14
PD14_FMC_D0: JP3.20
PD15_FMC_D1: JP3.19
PE2_KEY_UP_INT: JP1.34 JP5.38 | length 47.8
  Top Layer w0.254: v1(-45.009,-16.535) -40.03,-16.535 -35.154,-11.659 -35.154,-3.274 JP5.38
  Bottom Layer w0.254: JP1.34@-62.989,-29.083 -62.989,-24.7 -54.824,-16.535 v1(-45.009,-16.535)
PE3_KEY_DOWN: JP1.33 JP4.12
PE4_LCD_B0: JP1.5 JP5.21 | length 63.6
  Bottom Layer w0.254: JP1.5@-99.819,-29.083 -99.819,-17.878 -91.084,-9.144 -56.629,-9.144 -54.202,-6.717 JP5.21
PE5_LCD_G0: JP1.13 JP5.12 | length 48.4
  Top Layer w0.254: JP1.13@-89.659,-29.083 -89.659,-27.953 -89.659,-21.315 -85.539,-17.196 -67.081,-17.196 -65.608,-15.723 -65.608,-3.296 JP5.12
PE6_LCD_G1: JP1.14 JP5.13 | length 45.4
  Top Layer w0.254: JP1.14@-88.389,-29.083 -88.389,-27.953 -88.389,-22.057 -84.594,-18.263 -65.988,-18.263 -64.362,-16.637 JP5.13
PE7_FMC_D4: JP3.16
PE8_FMC_D5: JP3.15
PE9_FMC_D6: JP3.14
PE10_FMC_D7: JP3.13
PE11_FMC_D8: JP3.21
PE12_FMC_D9: JP3.22
PE13_FMC_D10: JP3.23
PE14_FMC_D11: JP3.24
PE15_FMC_D12: JP3.25
PF0_FMC_A0: JP3.12
PF1_FMC_A1: JP3.11
PF2_FMC_A2: JP3.10
PF3_FMC_A3: JP3.9
PF4_FMC_A4: JP2.15
PF5_FMC_A5: JP2.14
PF6_SAI1_SDB_SPI5_NSS: JP4.16
PF7_SAI1_MCLKB_SPI5_SCK: JP4.15
PF8_SAI1_SCKB_SPI5_MISO: JP4.17
PF9_SAI1_FSB_SPI5_MOSI: JP4.18
PF10_LCD_DE: JP1.36 JP5.33 | length 39.3
  Bottom Layer w0.254: JP1.36@-60.449,-29.083 -60.449,-25.752 -53.696,-18.999 -43.688,-18.999 -38.962,-14.273 JP5.33
PG3_USB1_P_EN: JP4.9
PG6_LCD_R7: JP1.30 JP5.10 | length 27.6
  Top Layer w0.254: JP5.10 -68.097,-3.347 v1(-68.097,-16.18)
  Bottom Layer w0.254: v1(-68.097,-16.18) -68.097,-16.434 -68.097,-29.054 JP1.30@-68.069,-29.083
PG7_LCD_CLK: JP1.39 JP5.30 | length 39.1
  Top Layer w0.254: JP1.39@-56.639,-29.083 -56.639,-27.953 -56.639,-26.362 -40.259,-9.982 -40.259,-1.346 -40.894,-0.711 -42.751,-0.711 JP5.30
PG10_LCD_B2: JP1.7 JP5.23 | length 64.4
  Bottom Layer w0.254: JP1.7@-97.279,-29.083 -97.279,-17.878 -90.297,-10.897 -54.522,-10.897 -51.662,-8.036 JP5.23
PG11_LCD_B3: JP1.8 JP5.24 | length 68
  Bottom Layer w0.254: JP1.8@-96.009,-29.083 -96.009,-17.878 -89.891,-11.76 -53.34,-11.76 -50.343,-8.763 -50.343,-3.321 JP5.24
PG12_LCD_B1: JP1.6 JP5.22 | length 67
  Bottom Layer w0.254: JP1.6@-98.549,-29.083 -98.549,-17.878 -90.729,-10.058 -55.753,-10.058 -52.908,-7.214 -52.908,-3.296 JP5.22
PG13_MII_TXD0: D1.3 JP2.6 | length 51.3
  Top Layer w0.254: JP2.6@-41.402,-36.833 -40.272,-36.833 -31.518,-36.833 -29.01,-39.341 -29.01,-68.863 -25.654,-72.219 D1.3
PG14_MII_TXD1: D1.4 JP2.7 | length 48.9
  Top Layer w0.254: JP2.7@-40.272,-38.103 -33.372,-38.103 -30.28,-41.196 -30.28,-69.085 -26.646,-72.719 D1.4
PH2_LCD_R0: JP1.23 JP5.3 | length 24.7
  Top Layer w0.254: JP5.3 -76.962,-4.642 v1(-76.962,-16.205)
  Bottom Layer w0.254: JP5.3 JP5.3@-76.962,-4.642 ; JP1.23@-76.959,-29.083 v1@-76.959,-16.205
PH3_LCD_R1: JP1.24 JP5.4 | length 27.6
  Top Layer w0.254: JP5.4 -75.692,-3.372 v1(-75.692,-16.18)
  Bottom Layer w0.254: JP1.24@-75.689,-29.083 v1@-75.689,-16.205
PH4_I2C_SCL: JP1.41 JP4.28 JP5.40 | length 43.2
  Top Layer w0.254: JP5.40 -29.47,-3.874 v1@-29.47,-8.515
  Bottom Layer w0.254: JP1.41@-54.099,-29.083 -54.099,-25.194 -50.19,-21.285 -41.326,-21.285 -29.489,-9.449 v1(-29.489,-8.534)
PH5_I2C_SDA: JP1.42 JP4.27 JP5.39 | length 37.2
  Top Layer w0.254: JP1.42@-52.829,-29.083 -52.829,-27.953 -52.829,-25.244 -47.828,-20.244 -42.164,-20.244 -31.342,-9.422 JP5.39
  Bottom Layer w0.254: JP5.39@-31.342,-5.002 JP5.39
PH6_MII_RXD2: D1.45 JP2.2 | length 56.6
  Top Layer w0.254: JP2.2@-40.272,-31.753 -23.238,-31.753 -18.718,-36.273 D1.45
PH7_MII_RXD3: D1.46 JP2.3 | length 55.2
  Top Layer w0.254: JP2.3@-40.272,-33.023 -23.06,-33.023 -19.218,-36.865 D1.46
PH8_LCD_R2: JP1.28 JP5.5 | length 26.2
  Top Layer w0.254: v1(-71.577,-7.874) -71.552,-7.874 -70.612,-8.814 v1(-70.612,-16.18)
  Bottom Layer w0.254: JP5.5 -74.522,-4.929 v1(-71.577,-7.874) ; JP1.28@-70.609,-29.083 -70.609,-16.227 v1@-70.561,-16.18
PH9_LCD_R3: JP1.27 JP5.6 | length 29.2
  Top Layer w0.254: v1(-72.339,-8.433) -71.857,-8.915 v1(-71.857,-16.18)
  Bottom Layer w0.254: JP5.6 -75.768,-3.248 -75.768,-5.004 v1(-72.339,-8.433) ; JP1.27@-71.879,-29.083 -71.879,-16.202 v1(-71.857,-16.18)
PH10_LCD_R4: JP1.26 JP5.7 | length 25
  Top Layer w0.254: v1(-73.152,-16.18) -73.152,-7.772 -71.982,-6.602 JP5.7
  Bottom Layer w0.254: JP1.26@-73.149,-29.083 v1@-73.149,-16.177
PH11_LCD_R5: JP1.25 JP5.8 | length 28.1
  Top Layer w0.254: v1(-74.422,-16.18) -74.422,-7.214 -73.254,-6.045 -73.254,-3.274 JP5.8
  Bottom Layer w0.254: JP1.25@-74.419,-29.083 v1@-74.419,-16.205
PH12_LCD_R6: JP1.29 JP5.9 | length 24.6
  Top Layer w0.254: JP5.9 -69.342,-4.642 v1(-69.342,-16.18)
  Bottom Layer w0.254: v1@-69.342,-16.154 -69.339,-16.158 JP1.29@-69.339,-29.083
PH13_LCD_G2: JP1.15 JP5.14 | length 48.6
  Top Layer w0.254: JP1.15@-87.119,-29.083 -87.119,-27.953 -87.119,-22.933 -83.537,-19.351 -64.817,-19.351 -63.043,-17.577 -63.043,-3.321 JP5.14
PH14_LCD_G3: JP1.16 JP5.15 | length 45.6
  Top Layer w0.254: JP1.16@-85.849,-29.083 -85.849,-27.953 -85.849,-23.619 -82.626,-20.396 -63.651,-20.396 -61.822,-18.567 JP5.15
PH15_LCD_G4: JP1.17 JP5.16 | length 48.8
  Top Layer w0.254: JP1.17@-84.579,-29.083 -84.579,-27.953 -84.579,-24.178 -81.788,-21.387 -62.611,-21.387 -60.528,-19.304 -60.528,-3.296 JP5.16
PI0_LCD_G5: JP1.18 JP5.17 | length 45.7
  Top Layer w0.254: JP1.18@-83.309,-29.083 -83.309,-27.953 -83.309,-24.813 -80.823,-22.327 -61.619,-22.327 -59.282,-19.99 JP5.17
PI1_LCD_G6: JP1.19 JP5.18 | length 48.9
  Top Layer w0.254: JP1.19@-82.039,-29.083 -82.039,-27.953 -82.039,-25.422 -79.832,-23.216 -60.401,-23.216 -58.039,-20.853 -58.039,-3.245 JP5.18
PI2_LCD_G7: JP1.20 JP5.19 | length 45.6
  Top Layer w0.254: JP1.20@-80.769,-29.083 -80.769,-27.953 -80.769,-26.251 -78.749,-24.232 -59.765,-24.232 -56.742,-21.209 JP5.19
PI3_I2S_SD: JP4.19
PI4_LCD_B4: JP1.9 JP5.25 | length 65.1
  Bottom Layer w0.254: JP1.9@-94.739,-29.083 -94.739,-17.878 -89.586,-12.725 -52.603,-12.725 -49.122,-9.244 JP5.25
PI5_LCD_B5: JP1.10 JP5.26 | length 68.4
  Bottom Layer w0.254: JP1.10@-93.469,-29.083 -93.469,-17.878 -89.205,-13.614 -51.765,-13.614 -47.854,-9.703 -47.854,-3.27 JP5.26
PI6_LCD_B6: JP1.11 JP5.27 | length 65.7
  Bottom Layer w0.254: JP1.11@-92.199,-29.083 -92.199,-17.878 -88.773,-14.453 -50.775,-14.453 -46.582,-10.26 JP5.27
PI7_LCD_B7: JP1.12 JP5.28 | length 68.7
  Bottom Layer w0.254: JP1.12@-90.929,-29.083 -90.929,-18.513 -87.808,-15.392 -49.911,-15.392 -45.339,-10.82 -45.339,-3.245 JP5.28
PI8_EXP3_SDDET: JP4.46 R38.2 S5.9 | length 30.7
  Top Layer w0.254: R38.2@-112.785,-94.061 -110.254,-96.592 S5.9@-110.254,-97.979
  Bottom Layer w0.254: v1(-112.785,-94.132) -112.785,-90.272 -99.825,-77.312 JP4.46@-99.825,-73.787
PI9_LCD_VSYNC: JP1.37 JP5.32 | length 34.4
  Top Layer w0.254: JP1.37@-59.179,-29.083 -59.179,-27.953 -59.179,-25.829 -42.697,-9.347 -42.697,-3.197 JP5.32
PI10_LCD_HSYNC: JP1.38 JP5.31 | length 31.3
  Top Layer w0.254: JP1.38@-57.909,-29.083 -57.909,-27.953 -57.909,-26.057 -41.502,-9.65 JP5.31
PI11_KEY_RIGHT: JP4.10
R1_CO: P2.2 R3.5 | length 15.6
  Top Layer w1: P2.2 P2.2@-127.737,-102.21
  Bottom Layer w1: P2.2 -127.737,-94.64 -125.12,-92.024 R3.5
R1_G: D4.1 Q1.3 R3.2 | length 22
  Top Layer w0.4: R3.2 -118.626,-98.024 D4.1 -114.935,-94.333 -114.935,-87.909 -113.093,-86.067 Q1.3
R1_NC: P2.3 R3.4 | length 22
  Top Layer w1: R3.4 -138.913,-88.7 -138.913,-99.466 -135.56,-102.819 P2.3
R1_NO: P2.1 R3.3 | length 15.6
  Top Layer w1: R3.3 -128.112,-98.024 -123.317,-102.819 P2.1
R1_V: A1.3 C16.1 C17.1 D4.2 JP1.3 JP1.4 JP4.6 JP4.7 JP4.49 JP4.50 JP5.1 P3.2 P4.1 P5.3 R3.1 | length 250.1
  Top Layer w0.5: A1.3 -56.467,-85.25 C17.1
  Top Layer w0.7: P3.2 -68.986,-76.987 -53.454,-76.987 ; C17.1 C16.1 -56.248,-79.781 -53.454,-76.987 ; JP4.7@-50.295,-74.917 -50.295,-76.432 -50.851,-76.987 -53.454,-76.987 ; JP4.6@-49.025,-73.787 -49.025,-74.917 -49.025,-77.467 -40.463,-86.029 P4.1
  Top Layer w1: R3.1 D4.2@-117.94,-86.024 ; D4.2 -117.221,-43.713 -130.824,-30.11 P5.3 ; JP1.3@-102.359,-27.953 -102.359,-25.556 -103.835,-24.079 ; JP1.4@-101.089,-29.083 -101.089,-27.953 -101.089,-24.743 -101.752,-24.079 -103.835,-24.079 ; JP5.1 -114.499,-4.542 -130.824,-20.867 P5.3 ; JP4.7@-50.295,-74.917 JP4.7@-50.295,-73.787 ; P5.3 -113.094,-27.877 -109.296,-24.079 -103.835,-24.079
RD+: D1.14 D2.3 R6.2 | length 22.6
  Top Layer w0.2: R6.2 -23.785,-90.245 D2.3@-23.785,-96.032
  Top Layer w0.254: R6.2 -26.18,-89.136 -27.026,-88.29 -27.026,-87.134 -19.718,-79.826 D1.14
RD-: D1.13 D2.6 R15.2 | length 31.5
  Top Layer w0.254: v1@-25.73,-91.11 -28.473,-88.367 -28.473,-83.642 -23.35,-78.519 D1.13 ; D2.6@-19.975,-93.492 -16.53,-90.048 R15.2
  Bottom Layer w0.254: v1(-25.705,-91.135) -22.332,-91.135 D2.6@-19.975,-93.492
RESET: D1.29 JP1.35 JP3.5 JP4.21 JP5.36 P1.2 | length 131.7
  Top Layer w0.254: JP4.21@-68.075,-73.787 -68.075,-71.631 -63.703,-67.259 -52.629,-67.259 -47.777,-72.111 P1.2 ; v1(-40.894,-14.453) -37.519,-11.077 -37.519,-3.099 JP5.36 ; P1.2@-37.262,-72.009 P1.2@-37.033,-72.009 ; D1.29 -9.787,-74.719 v1@-4.42,-80.087
  Bottom Layer w0.254: JP1.35@-61.719,-29.083 -61.719,-25.226 -54.247,-17.755 -44.196,-17.755 v1(-40.894,-14.453) ; P1.2 -36.525,-72.111 -35.712,-72.923 -35.712,-78.359 -32.893,-81.178 -4.978,-81.178 -4.42,-80.62 v1(-4.42,-80.162)
RS485_A: P12.3 R41.1 R42.2 | length 9
  Top Layer w0.254: R41.1 -84.586,-101.19 P12.3 -79.764,-99.525 R42.2@-79.193,-99.525
RS485_B: P12.1 R40.1 R42.1 | length 11.1
  Top Layer w0.254: R40.1@-73.588,-97.094 -73.639,-97.094 -75.809,-97.094 -76.907,-98.192 -76.907,-99.525 -73.664,-102.768 P12.1 P12.1@-73.238,-102.377
TD+: D1.17 D2.1 R1.2 | length 31.6
  Top Layer w0.254: R1.2 -32.562,-96.032 -26.325,-96.032 D2.1@-26.538,-96.245 ; v1@-21.463,-85.09 -19.025,-82.652 -19.025,-82.626 -18.218,-81.82 D1.17
  Bottom Layer w0.254: D2.1@-26.325,-96.032 -27.889,-94.468 -27.889,-87.071 -25.883,-85.065 v1(-21.488,-85.065)
TD-: D1.16 D2.2 R4.2 | length 32.6
  Top Layer w0.254: R4.2@-32.402,-93.492 D2.2@-25.055,-93.492 ; v1@-22.352,-83.972 v1(-22.327,-83.947) -18.718,-80.339 D1.16
  Bottom Layer w0.254: v1(-32.766,-93.878) -31.801,-93.878 -30.251,-92.329 -30.251,-86.766 -27.457,-83.972 -22.352,-83.972 v1(-22.327,-83.947) ; D2.2@-25.428,-93.866 D2.2@-25.055,-93.492
VBAT: BT1.1 JP4.11 | length 4.3
  Top Layer w0.254: JP4.11@-55.375,-73.787 -55.372,-73.784 BT1.1
VREF+: JP2.12
pads on no net: A1.4 A2.7 A2.10 B1.2 D1.8 D1.9 D1.10 D1.11 D1.12 D1.20 D1.21 D1.25 D1.40 D1.42 D2.0 D2.7 D2.S1 D2.S2 JP5.37 P12.2 S5.11 S5.12 S5.13 Y1.2 Y1.4
copper on no net:
  other v2: -162.37,-109 -4,-109 -107.798,-107.747 -99.771,-107.747 -162.37,-4
  other v3: -52.963,-110.005 -42.963,-110.005
  other v4: -55.321,-56.201
  other v5: -55.321,-63.241
  other v6: -4,-3.005

## Polygon pours and split planes (outlines as drawn)
GND on Top Layer "Top Layer-No Net" (solid, remove dead copper, pour order 10): 0.033,-112.999 0.033,0.001 -166.337,0.001 -166.312,-0.024 -166.312,-24.561 -166.312,-25.856 -115.817,-76.351 -115.69,-76.478 -115.69,-113.003 -94.43,-113.003 -94.379,-112.953 -93.211,-112.953 -93.211,-89.559 -91.204,-87.553 -90.975,-87.324 -69.919,-87.324 -69.512,-87.324 -66.871,-89.966 -66.414,-90.423 -66.414,-113.029
GND on Top Layer "Top Layer-No Net" (solid, remove dead copper, pour order 8): 0,-113 0,0
GND2 on Top Layer "Top Layer-No Net" (solid, remove dead copper, pour order 7): -85.623,-89.408 -72.288,-89.408 -68.885,-92.812 -68.707,-92.989 -68.707,-113 -91.999,-113 -91.923,-112.924 -91.923,-92.608 -88.722,-89.408
GND on Bottom Layer "Top Layer-No Net" (solid, remove dead copper, pour order 9): -0.026,-113.006 -0.026,-0.006 -166.396,-0.006 -166.371,-0.031 -166.371,-24.567 -166.371,-25.863 -115.875,-76.358 -115.748,-76.485 -115.748,-113.01 -94.489,-113.01 -94.438,-112.959 -93.269,-112.959 -93.269,-89.566 -91.263,-87.559 -91.034,-87.331 -69.978,-87.331 -69.571,-87.331 -66.93,-89.972 -66.472,-90.43 -66.472,-113.036
GND2 on Bottom Layer "Top Layer-No Net" (solid, remove dead copper, pour order 6): -85.623,-89.408 -72.288,-89.408 -68.885,-92.812 -68.707,-92.989 -68.707,-113 -91.999,-113 -91.923,-112.924 -91.923,-92.608 -88.722,-89.408

## Keep-outs
Keep-Out Layer:
  the board outline again, w0.254

## Other copper
Top Layer:
  rectangle net +3.3V_1: -62.103,-110.82 -59.512,-103.759

## Silkscreen, mask and mechanical layers (free items; w line width, h text height)
Top Overlay:
  text "Wireless Temp_6Channel" at -155.372,-4.496 h2
  text "Thermal image" at -155.372,-10.122 h2
  text "Design By KJ" at -155.372,-15.748 h2
  text "JTAG" at -34.519,-57.76 h1.52
  text "G" at -34.823,-75.565 h1.52
  text "SPI2" at -39.395,-82.118 h1.52
  text "AC 110~220V" at -163.398,-95.326 h1.52
  text "Alarm" at -119.228,-102.845 h1.52 r270
  text "RS485" at -93.828,-106.553 h1.52
  text "A" at -88.367,-112.243 h3
  text "B" at -69.063,-112.243 h3

## Text inside footprints (layer, text, board x,y; h text height)
JP5: Top Overlay "39" at -29.31,-5.05 h1.27; Top Overlay "40" at -29.31,-2.51 h1.27; Top Overlay "2" at -82.142,-2.51 h1.27; Top Overlay "1" at -82.142,-5.05 h1.27